# Altium PCB PCB_MLX90640热成像_2023-05-21.pcbdoc
Units mil, origin at the board's own origin, x right, y up, seen from the top; angles counter-clockwise.
Board outline 2318.74 x 1668.13 mil, 2 copper layers (Top Layer, Bottom Layer); 24 components, 19 nets, 138 pads, 22 vias.
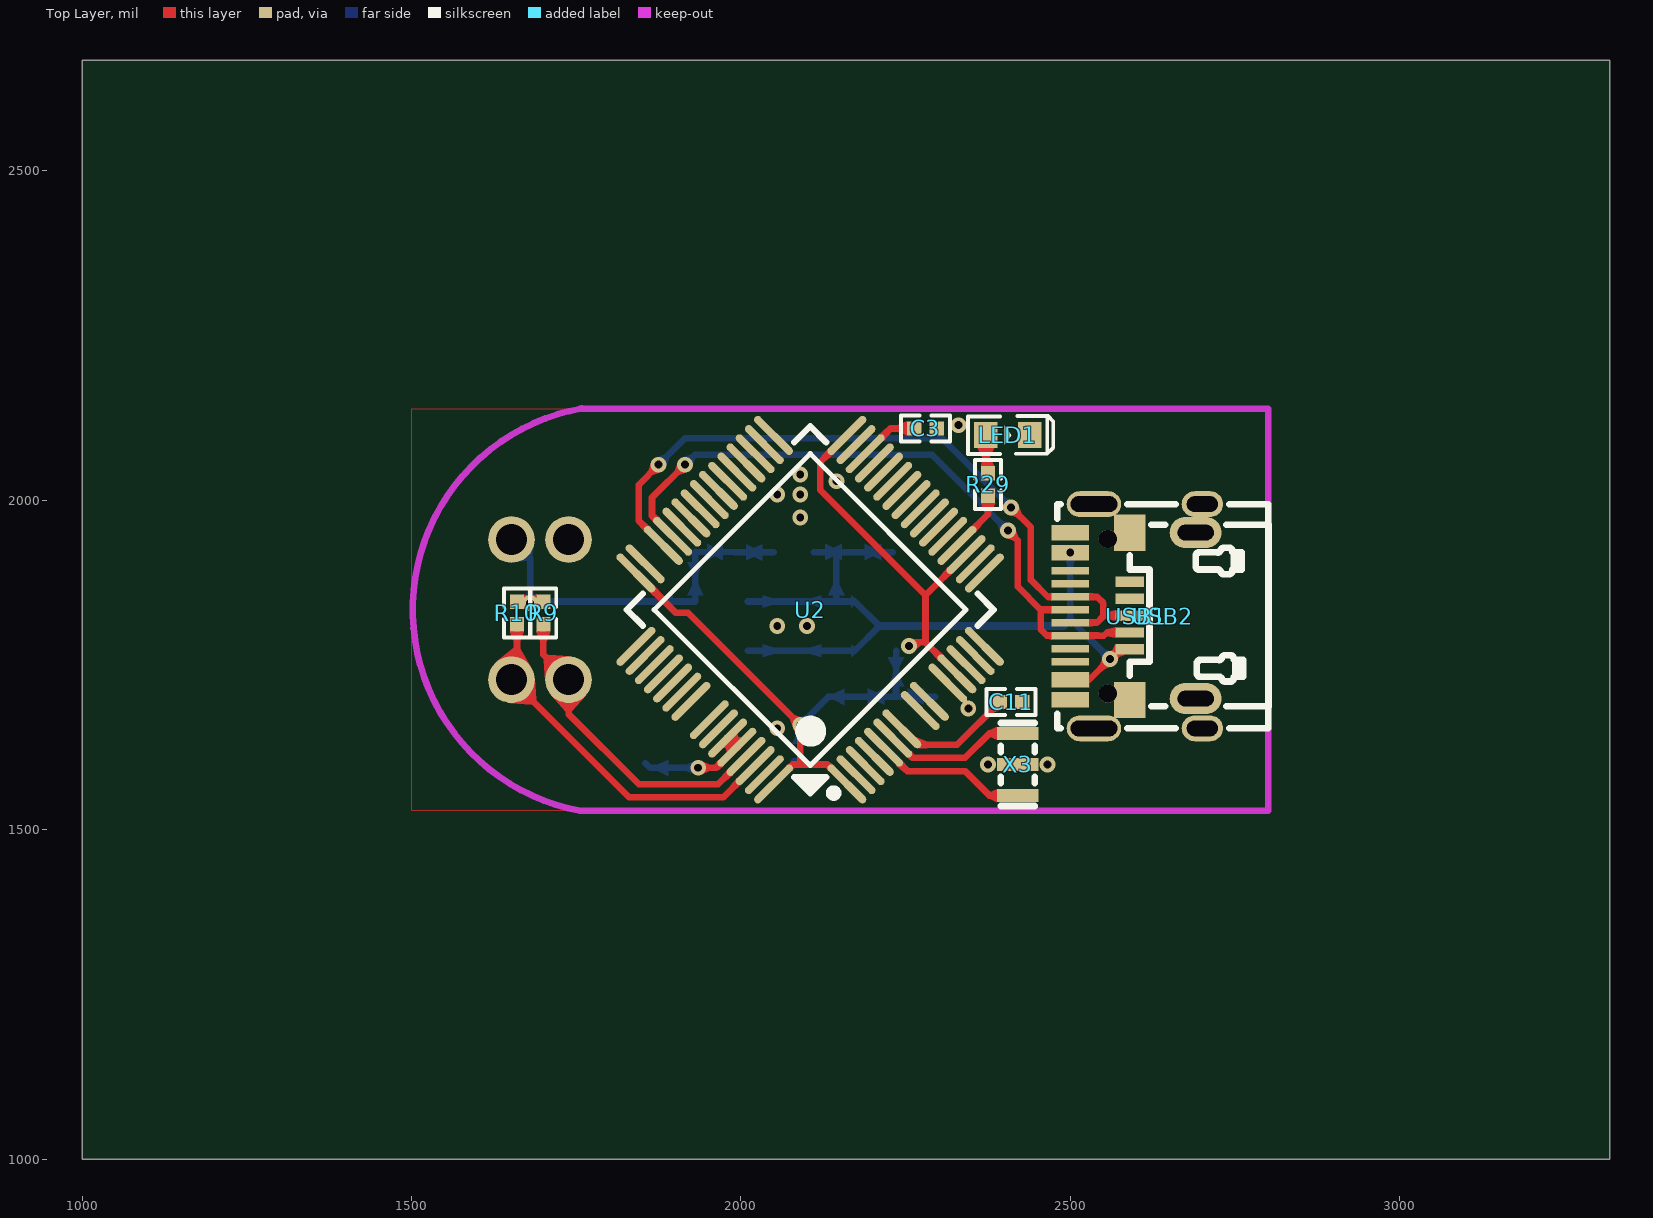
[diagram p0: Top Layer view]
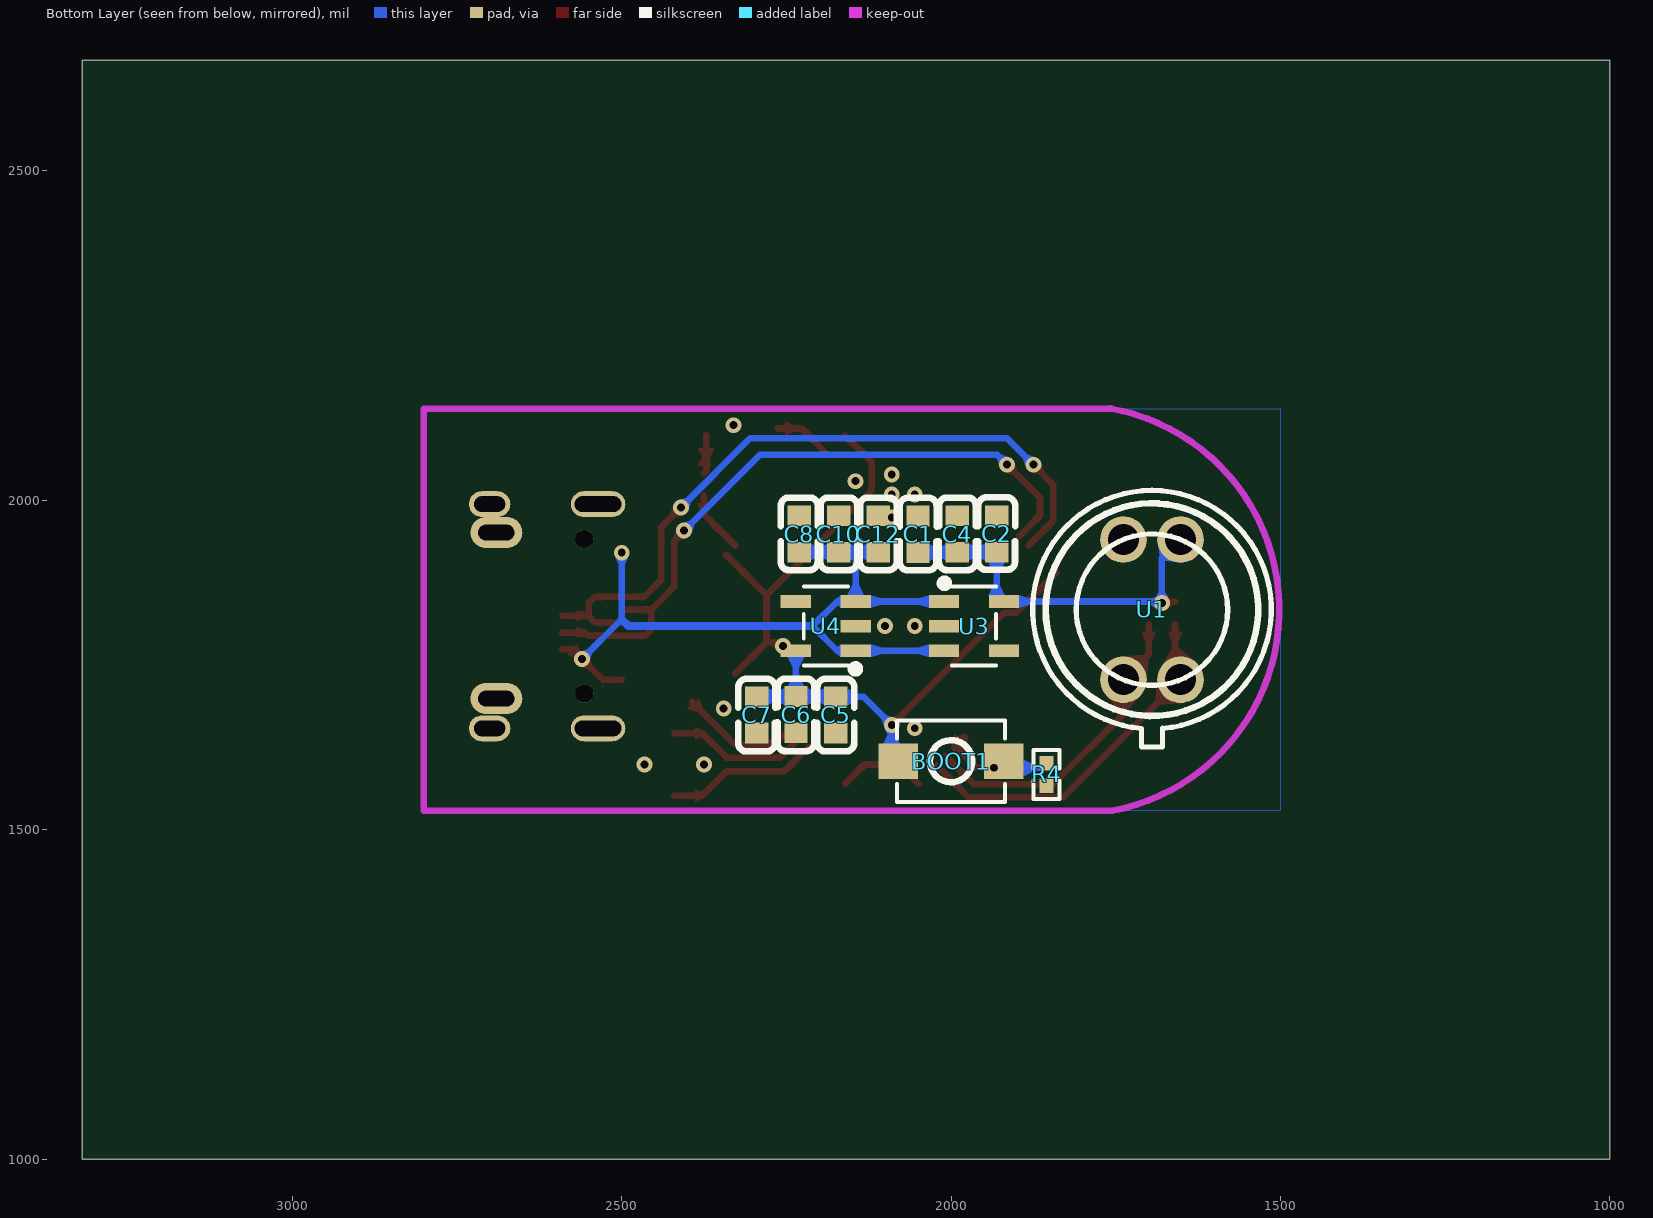
[diagram p1: Bottom Layer view, seen from below]

## Layer stack, top to bottom
Top Layer: signal copper (thickness not stored)
Dielectric: dielectric 12.6, FR-4, Dk 4.8
Bottom Layer: signal copper (thickness not stored)

## Board outline
3318.74,1000 1000,1000 1000,2668.13 3318.74,2668.13

## Components (designator, comment, footprint, x,y, rotation, side; value= is the part's Value field where it differs from the comment)
BOOT1 "两脚小龟 3*4*2" SW-SMD_L4.0-W2.9-LS5.0 2000,1604.07 r0 bottom
C1 "10uF" C0603 2050.01,1948.53 r90 bottom
C2 "100nF" C0603 1930.81,1949.2 r90 bottom
C3 "2.2uf" R0402#1 2280,2109.07 r0 top
C4 "100nF" C0603 1990.41,1948.87 r90 bottom
C5 "10uF" C0603 2174.79,1674.34 r270 bottom
C6 "100nF" C0603 2235.19,1674.68 r270 bottom
C7 "100nF" C0603 2294.79,1674.34 r270 bottom
C8 "10uF" C0603 2230.41,1948.87 r90 bottom
C10 "100nF" C0603 2170.41,1948.87 r90 bottom
C11 "100nf" R0402#1 2410,1694.07 r0 top
C12 "100nF" C0603 2110.41,1948.87 r90 bottom
LED1 "LED-0603_R" LED0603_RED 2405,2099.07 r0 top
R4 "10K" R0402#2 1855,1584.07 r270 bottom
R9 "4.7K" R0402#1 1700,1829.07 r90 top
R10 "4.7K" R0402#1 1660,1829.07 r90 top
R29 "1K" R0402#1 2375,2024.07 r90 top
U1 "MLX90640ESF-BAB-000-TU" TO-39-4_MELEXIS_MLX90640 1695,1834.07 r180 bottom
U2 "STM32F446RCT6" STM32F446 2105,1834.07 r45 top
U3 "ME6233C30M5G" SOT-23-5_L3.0-W1.7-P0.95-LS2.8-BL 1965,1809.07 r90 bottom
U4 "ME6233C30M5G" SOT-23-5_L3.0-W1.7-P0.95-LS2.8-BL 2190,1809.07 r270 bottom
USB1 "TYPEC-304-BCP16" USB-C-SMD_TYPEC-304-BCP16 2600,1824.07 r90 top
USB2 "MICRO 4P DIP" MICRO-USB-SMD_MICRO-USB-A5 2640,1824.07 r90 top
X3 "8MHz" X3213 2420,1599.07 r270 top

## Footprints (in the part's own frame and the unit in brackets; to place one, negate y for a bottom-side part, rotate by r counter-clockwise, add the part's x,y. Pads: shape width x height; smd on the part's side, far side on the other; paste and mask are expansions set on the pad)
C0603 [mm]
  rect 0.8x0.9 smd paste+0 mask+0.051: 1(0.7,0) 2(-0.7,0)
  silkscreen extent -1.39,-0.72 1.41,0.71
LED0603_RED [mm]
  rect 0.9x1 smd paste+0 mask+0.051: 1(-0.85,0) 2(0.85,0)
  silkscreen extent -1.54,-0.73 1.75,0.73
MICRO-USB-SMD_MICRO-USB-A5 [mm]
  rect 0.4x1.1 smd paste-100 mask+0.051: 1(-1.275,1.27) 2(-0.625,1.27) 3(0.025,1.27) 4(0.675,1.27) 5(1.325,1.27)
  rect 1.4x1.2 smd paste-100 mask+0.051: 6(-3.225,1.27) 7(3.22,1.27)
  oval 1.2x2 hole 0.6 slot 1.4 at 90 deg paste+0 mask+0.051: 8(-3.175,-1.27) 9(3.225,-1.27)
  silkscreen extent -3.48,-4.08 3.52,1.27
R0402#1 [mm]
  rect 0.566x0.54 smd paste-100 mask+0.051: 1(-0.433,0) 2(0.433,0)
  silkscreen extent -0.94,-0.5 0.94,0.5
R0402#2 [mm]
  rect 0.566x0.54 smd paste-100 mask+0.051: 1(0.433,0) 2(-0.433,0)
  silkscreen extent -0.94,-0.5 0.94,0.5
SOT-23-5_L3.0-W1.7-P0.95-LS2.8-BL [mm]
  rect 0.49x1.157 smd paste+0 mask+0.051: 1(0.95,1.154) 2(0,1.154) 3(-0.95,1.154)
  rect 0.49x1.175 smd paste+0 mask+0.051: 4(-0.95,-1.154) 5(0.95,-1.154)
  silkscreen extent -1.53,-0.85 1.8,1.29
STM32F446 [mm]
  oval 0.3x2 smd paste+0 mask+0.051: 1(-3.75,-5.75) 2(-3.25,-5.75) 3(-2.75,-5.75) 4(-2.25,-5.75) 5(-1.75,-5.75) 6(-1.25,-5.75) 7(-0.75,-5.75) 9(0.25,-5.75) 10(0.75,-5.75) 12(1.75,-5.75) 13(2.25,-5.75) 14(2.75,-5.75) 15(3.25,-5.75) 16(3.75,-5.75) 33(3.75,5.75) 34(3.25,5.75) 35(2.75,5.75) 36(2.25,5.75) 37(1.75,5.75) 38(1.25,5.75) 39(0.75,5.75) 40(0.25,5.75) 41(-0.25,5.75) 42(-0.75,5.75) 43(-1.25,5.75) 44(-1.75,5.75) 45(-2.25,5.75) 47(-3.25,5.75) 48(-3.75,5.75)
  oval 2x0.3 smd paste+0 mask+0.051: 17(5.75,-3.75) 18(5.75,-3.25) 19(5.75,-2.75) 20(5.75,-2.25) 21(5.75,-1.75) 22(5.75,-1.25) 23(5.75,-0.75) 24(5.75,-0.25) 25(5.75,0.25) 26(5.75,0.75) 27(5.75,1.25) 28(5.75,1.75) 29(5.75,2.25) 30(5.75,2.75) 31(5.75,3.25) 32(5.75,3.75) 49(-5.75,3.75) 50(-5.75,3.25) 51(-5.75,2.75) 52(-5.75,2.25) 53(-5.75,1.75) 54(-5.75,1.25) 55(-5.75,0.75) 57(-5.75,-0.25) 58(-5.75,-0.75) 59(-5.75,-1.25) 60(-5.75,-1.75) 61(-5.75,-2.25) 62(-5.75,-2.75) 63(-5.75,-3.25) 64(-5.75,-3.75)
  silkscreen extent -5,-5.79 5,5
SW-SMD_L4.0-W2.9-LS5.0 [mm]
  rect 1.53x1.36 smd paste+0 mask+0.051: 1(2.035,0) 2(-2.035,0)
  silkscreen extent -2.08,-1.58 2.08,1.58
TO-39-4_MELEXIS_MLX90640 [mm]
  round 1.8 hole 1.2 paste+0 mask+0.05: 1(1.1,-2.699) 2(1.1,2.701) 3(-1.1,2.701) 4(-1.1,-2.699)
  silkscreen extent -4.6,-5.3 4.6,4.6
USB-C-SMD_TYPEC-304-BCP16 [mm]
  oval 1x2.1 hole 0.6 slot 1.8 at 90 deg paste+0 mask+0.051: 13(-4.32,1.633) 14(4.32,1.633)
  oval 1x1.6 hole 0.6 slot 1.2 at 90 deg paste+0 mask+0.051: 15(-4.32,-2.547) 16(4.32,-2.547)
  rect 0.6x1.45 smd paste+0 mask+0.051: A1B12(-3.225,2.547) A4B9(-2.45,2.547) B1A12(3.22,2.547) B4A9(2.45,2.547)
  rect 0.3x1.45 smd paste+0 mask+0.051: A5(-1.25,2.547) A6(-0.25,2.547) A7(0.25,2.547) A8(1.25,2.547) B5(1.75,2.547) B6(0.75,2.547) B7(-0.75,2.547) B8(-1.75,2.547)
  round 0.7 hole 0.7 unplated paste+0: ""(-2.98,1.103) ""(2.98,1.103)
  silkscreen extent -4.32,-5.08 4.32,3.05
X3213 [mm]
  rect 0.5x1.6 smd paste+0 mask+0.051: 1(-1.199,0) 2(0,0) 3(1.199,0)
  silkscreen extent -1.6,-0.65 1.6,0.65

## Via types
v1: diameter 24, hole 12, Top Layer to Bottom Layer, tented both sides, 22 vias

## Nets (pads, with @x,y where several pads share a name; then routed paths per layer and width w, separated by ;. In a path a pad name is that pad's centre, name@x,y a point inside that pad or via, vN(x,y) a via of type N, cw(c..) or ccw(c..) an arc to the next point about the centre after c; other vN are vias at no path point)
3V3_1: BOOT1.1 C5.2 C6.2 C7.2 U2.1 U2.13 U2.19 U2.32 U2.48 U2.64 U4.5 | length 1481.6
  Top Layer w10: U2.48@1840.49,1889.77 1901.19,1829.07 1919.99,1829.07 v1(2090,1659.07) 2089.99,1599.07 2078.79,1599.07 U2.64 ; 2085.19,1599.07 2131.19,1599.07 U2.1 ; U2.32@2160.69,2098.57 2119.99,2057.87 2119.99,2015.97 2279.99,1855.97 ; v1(2255,1779.07) 2260.27,1784.34 2280,1784.34 ; U2.13@2327.69,1736.67 2279.99,1784.37 ; U2.19 2279.99,1855.97 ; 2279.99,1784.37 2279.99,1855.97
  Bottom Layer w10: BOOT1.1 2089.99,1604.07 v1(2090,1659.07) 2132.79,1701.87 C5.2 C6.2@2235.19,1702.27 ; U4.5 C6.2@2235.19,1702.27 ; C7.2 C6.2@2235.19,1702.27
3V3_2: C1.2 C2.2 C4.2 R9.2 R10.2 U1.2 U3.5 | length 594.2
  Top Layer w10: R10.2 R9.2
  Bottom Layer w10: U1.2 1680,1912.06 v1(1680,1844.07) 1682.39,1846.47 U3.5 1930.79,1846.47 1930.79,1921.67 C4.2 C1.2
+5V: C8.2 C10.2 C12.2 U3.1 U3.3 U4.1 U4.3 USB1.A4B9 USB1.B4A9 USB2.1 | length 1214.9
  Top Layer w10: USB1.A4B9 2528.49,1727.57 v1(2560,1759.07) 2574.79,1773.87 USB2.1
  Bottom Layer w10: U3.3 U4.1 2172.59,1771.67 2209.99,1809.07 2172.59,1846.47 U4.3 ; U3.1 U4.3 ; C12.2 C10.2 C8.2 ; 2144.59,1921.27 U4.3 ; v1(2499.7,1920.57) 2499.7,1819.37 v1(2560,1759.07)
  Bottom Layer w12.2: 2210,1809.07 2489.4,1809.07 2499.7,1819.37
GND: C1.1 C2.1 C3.2 C4.1 C5.1 C6.1 C7.1 C8.1 C10.1 C11.2 C12.1 LED1.2 R4.1 U1.3 U2.12 U2.18 U2.31 U2.47 U2.63 U3.2 U4.2 USB1.13 USB1.14 USB1.15 USB1.16 USB1.A1B12 USB1.B1A12 USB2.5 USB2.6 X3.2
  other v1: 2375,1599.07 2465,1599.07 2055,1654.07 2345,1684.07 2055,1809.07 2100,1809.07 2090,1974.07 2055,2009.07 2090,2009.07 2145,2029.07 2090,2039.07 2330,2114.07
LED1_1: LED1.1 R29.2 | length 59.4
  Top Layer w10: LED1.1 2371.49,2044.57 R29.2
R29_1: R29.1 U2.20 | length 95.2
  Top Layer w10: U2.20 2374.99,1978.77 R29.1@2374.99,2007.07
SCL: R9.1 U1.4 U2.61 | length 483.2
  Top Layer w10: R9.1@1699.99,1812.07 1699.99,1766.07 U1.4 1738.29,1675.77 1844.99,1569.07 1965.29,1569.07 U2.61
SDA: R10.1 U1.1 U2.62 | length 551.6
  Top Layer w10: R10.1@1659.99,1812.07 1659.99,1736.07 U1.1 1830.39,1549.07 1973.09,1549.07 U2.62@2021.49,1597.47
SPI1_CS: U2.24
SPI_MISO1: U2.22
SPI_MOSI1: U2.23
SPI_SCK1: U2.21
U2_5: U2.5 X3.3 | length 234.1
  Top Layer w10: U2.5@2216.29,1625.27 2252.59,1589.07 2339.99,1589.07 2377.19,1551.87 X3.3
U2_6: U2.6 X3.1 | length 217.2
  Top Layer w10: U2.6 2259.99,1609.47 2340.39,1609.47 2377.19,1646.27 X3.1
U2_7: C11.1 U2.7 | length 185.7
  Top Layer w10: U2.7@2244.19,1653.17 2268.19,1629.07 2327.99,1629.07 C11.1
U2_30: C3.1 U2.30 | length 90.4
  Top Layer w10: U2.30 2226.89,2109.07 C3.1
U2_59: BOOT1.2 R4.2 U2.59 U2.60 | length 174.1
  Top Layer w10: v1(1935,1594.07) 1962.39,1594.07 U2.60
  Top Layer w12.2: U2.59 U2.60
  Bottom Layer w10: R4.2 1861.99,1594.07 v1(1935,1594.07)
USB_DM: U2.44 USB1.A7 USB1.B7 USB2.2 | length 1042.4
  Top Layer w10: U2.44@1896.19,1945.47 1864.99,1976.67 1864.99,2004.07 v1(1915,2054.07) ; v1(2405,1954.07) 2420,1939.07 2420,1869.07 2454.8,1833.87 ; USB1.A7 2454.79,1833.87 ; USB2.2 2554.99,1799.07 2550.49,1794.57 2499.69,1794.57 2464.49,1794.57 2454.79,1804.27 2454.79,1833.87
  Bottom Layer w10: v1(1915,2054.07) 1930,2069.07 2290,2069.07 v1(2405,1954.07)
USB_DP: U2.45 USB1.A6 USB1.B6 USB2.3 | length 1106.5
  Top Layer w10: v1(1875,2054.07) 1844.99,2023.67 1844.99,1968.77 U2.45 ; v1(2410,1989.07) 2439.99,1959.07 2439.99,1879.07 2465.49,1853.57 USB1.B6 2540.49,1853.57 2549.99,1844.07 2549.99,1826.07 2550.99,1825.07 ; USB1.A6@2499.69,1814.27 2540.19,1814.27 2550.99,1825.07 ; USB2.3@2589.99,1825.07 2550.99,1825.07
  Bottom Layer w10: v1(1875,2054.07) 1915,2094.07 2305,2094.07 v1(2410,1989.07)
pads on no net: U2.2 U2.3 U2.4 U2.9 U2.10 U2.14 U2.15 U2.16 U2.17 U2.25 U2.26 U2.27 U2.28 U2.29 U2.33 U2.34 U2.35 U2.36 U2.37 U2.38 U2.39 U2.40 U2.41 U2.42 U2.43 U2.49 U2.50 U2.51 U2.52 U2.53 U2.54 U2.55 U2.57 U2.58 U3.4 U4.4 USB1. USB1.A5 USB1.A8 USB1.B5 USB1.B8 USB2.4 USB2.7 USB2.8 USB2.9

## Polygon pours and split planes (outlines as drawn)
GND on Bottom Layer (solid): 1500,2139.07 1500,1529.07 2800,1529.07 2800,2139.07
GND on Top Layer (solid): 1500,2139.07 2800,2139.07 2800,1529.07 1500,1529.07

## Keep-outs
Keep-Out Layer:
  lines w10: 1756.4,1528.74 cw(c1811.95,1833.9) 1758.21,2139.39

## Other copper
Top Layer:
  region net SCL: 1988.09,1583.52 1979.74,1591.87 1969.78,1580.62 1976.85,1573.55
  region net R29_1: 2355.55,1950.97 2347.2,1959.33 2358.45,1969.29 2365.52,1962.21
  region net 3V3_1: 2141.18,1597.43 2132.83,1589.08 2127.67,1595.53 2134.74,1602.6
  region net U2_5: 2244.18,1605.8 2235.84,1597.43 2247.11,1587.48 2254.17,1594.57
  region net U2_6: 2258.11,1619.71 2249.75,1611.37 2256.46,1605.93 2263.54,1613
  region net U2_7: 2264.7,1640.95 2269.41,1623.76 2282.57,1624.07 2280.98,1634.07
  region net 3V3_1: 2308.22,1764.47 2299.85,1756.13 2289.9,1767.39 2296.98,1774.45
  region net 3V3_1: 2322.14,1889.73 2313.79,1898.09 2303.82,1886.85 2310.88,1879.78
  region net U2_30: 2208,2098.54 2216.35,2090.18 2230.44,2105.53 2223.36,2112.6
  region net 3V3_1: 2141.18,2070.69 2132.83,2079.04 2122.86,2067.8 2129.93,2060.72
  region net USB_DM: 1876.73,1973.24 1868.36,1964.91 1861.46,1973.14 1868.55,1980.19
  region net USB_DP: 1862.81,1959.34 1854.47,1950.98 1844.48,1962.21 1851.55,1969.29
  region net 3V3_1: 1868.38,1870.25 1860.03,1861.9 1875.45,1847.75 1882.52,1854.82
  region net U2_59: 1994.66,1645.78 1973.08,1624.21 1989.29,1620.95 1997.92,1629.58
  region net U2_59: 1978.66,1618.64 2000.23,1640.21 1984.02,1643.48 1975.39,1634.85
  region net U2_59: 1974.15,1597.43 1965.82,1605.8 1958.87,1597.61 1965.93,1590.52
  region net SDA: 2002,1569.59 1993.66,1577.95 1983.68,1566.72 1990.74,1559.64
  region net 3V3_1: 2077.17,1589.08 2068.82,1597.43 2075.26,1602.6 2082.34,1595.53
  region net +5V: 2528.25,1739.42 2528.25,1715.8 2528.5,1722.57 2528.5,1732.57
  region net USB_DM: 2528.25,1800.44 2528.25,1788.63 2543.25,1789.57 2543.25,1799.57
  region net USB_DM: 2471.16,1788.63 2471.16,1800.44 2464.5,1799.57 2464.5,1789.57
  region net USB_DP: 2528.25,1820.13 2528.25,1808.32 2540.2,1809.27 2540.2,1819.27
  region net USB_DM: 2471.16,1828 2471.16,1839.81 2456.16,1838.87 2456.16,1828.87
  region net USB_DP: 2528.25,1859.5 2528.25,1847.69 2540.5,1848.57 2540.5,1858.57
  region net USB_DP: 2471.16,1847.69 2471.16,1859.5 2465.5,1858.57 2465.5,1848.57
  region net USB_DP: 2568.35,1817.17 2568.35,1832.91 2553.35,1830.07 2553.35,1820.07
  region net USB_DM: 2568.35,1791.58 2568.35,1807.32 2555,1804.07 2555.06,1794.07
  region net +5V: 2582.16,1765.98 2568.35,1781.73 2561.1,1767.24 2567.71,1759.71
  region net U2_30: 2251.82,2119.7 2251.82,2098.43 2236.82,2104.07 2236.82,2114.07
  region net U2_7: 2400.8,1683.43 2381.82,1699.71 2376.43,1684.57 2384.05,1678.04
  region net SCL: 1689.37,1800.89 1710.63,1800.89 1705,1785.89 1695,1785.89
  region net 3V3_2: 1689.37,1834.97 1689.37,1857.24 1674.37,1851.07 1674.37,1841.07
  region net SDA: 1649.37,1800.89 1670.63,1800.89 1665,1785.89 1655,1785.89
  region net 3V3_2: 1670.63,1857.24 1670.63,1834.97 1685.63,1841.07 1685.63,1851.07
  region net LED1_1: 2384,2079.38 2359,2079.38 2366.5,2064.38 2376.5,2064.38
  region net R29_1: 2364.37,1995.89 2385.63,1995.89 2380,1980.89 2370,1980.89
  region net LED1_1: 2364.37,2052.24 2384,2052.24 2376.5,2067.24 2366.5,2067.24
  region net U2_5: 2388.5,1542.02 2388.5,1561.71 2377.2,1556.87 2377.2,1546.87
  region net U2_6: 2388.5,1636.42 2388.5,1656.11 2377.2,1651.27 2377.2,1641.27
  region net U2_59: 1942.94,1585.07 1942.94,1603.07 1951.34,1599.07 1951.34,1589.07
  region net 3V3_2: 1673.22,1853.97 1671.02,1836.11 1663.17,1841.07 1664.4,1851.07
  region net 3V3_2: 1688.98,1836.11 1686.78,1853.97 1695.6,1851.07 1696.83,1841.07
  region net 3V3_1: 2265.42,1773.11 2259.61,1790.15 2268.76,1789.34 2272.17,1779.34
  region net USB_DM: 2416.98,1954.82 2404.25,1942.09 2413.02,1938.98 2420.09,1946.05
  region net USB_DP: 2421.98,1989.82 2409.25,1977.09 2418.02,1973.98 2425.09,1981.05
  region net USB_DM: 1915.75,2042.09 1903.02,2054.82 1899.91,2046.05 1906.98,2038.98
  region net USB_DP: 1875.83,2042.1 1863.02,2054.74 1859.97,2045.95 1867.08,2038.93
  region net +5V: 2560.75,1747.09 2548.02,1759.82 2544.91,1751.05 2551.98,1743.98
  region net +5V: 2571.98,1758.32 2559.25,1771.04 2568.02,1774.16 2575.09,1767.08
  region net 3V3_1: 2081,1651.13 2099,1651.13 2095,1642.73 2085,1642.73
  region net 3V3_1: 2090.75,1671.04 2078.02,1658.32 2074.91,1667.08 2081.98,1674.16
  region net SDA: 1629.55,1755.43 1681.9,1746.27 1665,1774.41 1655,1776.16
  region net SDA: 1649.48,1692.4 1687.05,1729.99 1689.34,1697.2 1682.27,1690.12
  region net SCL: 1702.95,1725.54 1740.52,1763.13 1707.73,1765.41 1700.66,1758.34
  region net SCL: 1764.88,1704.32 1711.73,1704.33 1733.3,1679.53 1743.3,1679.53
Bottom Layer:
  region net 3V3_2: 1896.45,1856.11 1896.45,1836.82 1881.45,1841.47 1881.45,1851.47
  region net 3V3_2: 1942.71,1856.11 1918.3,1856.11 1925.8,1871.11 1935.8,1871.11
  region net +5V: 2033.2,1762.02 2033.2,1781.31 2048.2,1776.66 2048.2,1766.66
  region net +5V: 2033.2,1836.82 2033.2,1856.11 2048.2,1851.47 2048.2,1841.47
  region net 3V3_2: 2032.29,1933.55 2032.29,1908.55 2017.29,1916.13 2017.29,1926.13
  region net 3V3_2: 1948.53,1909.05 1948.53,1934.05 1963.53,1926.45 1963.53,1916.45
  region net 3V3_2: 1918.3,1905.89 1943.3,1905.89 1935.8,1890.89 1925.8,1890.89
  region net 3V3_2: 1972.69,1933.89 1972.69,1908.89 1957.69,1916.49 1957.69,1926.49
  region net 3V3_2: 2008.13,1908.68 2008.13,1933.68 2023.13,1926.1 2023.13,1916.1
  region net 3V3_1: 2192.51,1689.48 2192.51,1714.48 2207.51,1707.08 2207.51,1697.08
  region net 3V3_1: 2157.07,1714.37 2157.07,1689.37 2142.07,1696.87 2142.07,1706.87
  region net 3V3_1: 2217.47,1714.65 2217.47,1689.65 2202.47,1697.05 2202.47,1707.05
  region net 3V3_1: 2252.91,1689.65 2252.91,1714.65 2267.91,1707.05 2267.91,1697.05
  region net 3V3_1: 2247.75,1717.99 2222.75,1717.99 2230.29,1732.99 2240.29,1732.99
  region net 3V3_1: 2277.07,1714.49 2277.07,1689.49 2262.07,1697.09 2262.07,1707.09
  region net 3V3_1: 2222.87,1762.02 2247.87,1762.02 2240.33,1747.02 2230.33,1747.02
  region net +5V: 2121.8,1856.11 2121.8,1836.82 2106.8,1841.47 2106.8,1851.47
  region net +5V: 2157.1,1856.11 2132.1,1856.11 2139.6,1871.11 2149.6,1871.11
  region net +5V: 2167.36,1836.82 2167.36,1856.11 2172.6,1851.47 2172.6,1841.47
  region net +5V: 2121.8,1781.31 2121.8,1762.02 2106.8,1766.66 2106.8,1776.66
  region net +5V: 2167.36,1762.02 2167.36,1781.31 2172.6,1776.66 2172.6,1766.66
  region net +5V: 2212.69,1933.77 2212.69,1908.77 2197.69,1916.27 2197.69,1926.27
  region net +5V: 2152.69,1933.77 2152.69,1908.77 2137.69,1916.27 2137.69,1926.27
  region net +5V: 2188.13,1908.77 2188.13,1933.77 2203.13,1926.27 2203.13,1916.27
  region net +5V: 2128.13,1908.77 2128.13,1933.77 2143.13,1926.27 2143.13,1916.27
  region net U2_59: 1889.76,1581.57 1889.76,1606.57 1874.76,1599.07 1874.76,1589.07
  region net 3V3_1: 2102.5,1630.84 2077.5,1630.84 2085,1645.84 2095,1645.84
  region net U2_59: 1927.06,1585.07 1927.06,1603.07 1918.66,1599.07 1918.66,1589.07
  region net 3V3_2: 1689.17,1836.33 1686.53,1854.14 1695.42,1851.47 1696.9,1841.47
  region net 3V3_2: 1671,1852 1689,1852 1685,1860.4 1675,1860.4
  region net USB_DM: 2405.75,1966.04 2393.02,1953.32 2389.91,1962.08 2396.98,1969.16
  region net USB_DP: 2410.75,2001.04 2398.02,1988.32 2394.91,1997.08 2401.98,2004.16
  region net USB_DM: 1926.98,2053.32 1914.25,2066.04 1923.02,2069.16 1930.09,2062.08
  region net USB_DP: 1886.98,2053.32 1874.25,2066.04 1883.02,2069.16 1890.09,2062.08
  region net +5V: 2560.75,1771.04 2548.02,1758.32 2544.91,1767.08 2551.98,1774.16
  region net 3V3_1: 2101.98,1658.32 2089.25,1671.04 2098.02,1674.16 2105.09,1667.08
  region net 3V3_1: 2081,1651.13 2099,1651.13 2095,1642.73 2085,1642.73
  region net +5V: 2508.7,1912.63 2490.7,1912.63 2494.7,1904.23 2504.7,1904.23
  region net 3V3_2: 1649.47,1905 1687.05,1942.59 1683.54,1915.59 1676.47,1908.52